# EAGLE board SimpleTimerPCB (EAGLE 6.5.0)

Size 50 x 30 mm. Coordinates in mm from the lower left corner, seen from the top.
Outline: 0,0 50,0 50,30 0,30 0,0
Copper layers (1*16): Top 0.035mm / dielectric 1.5mm / Bottom 0.035mm
Design rules "Elecrow_2-layer_eagle_rule": minimum track width 6mil, minimum drill 12mil, track to track 6mil, track to pad 6mil, pad to pad 6mil, via to via 6mil, smd to smd 0mil, copper to edge 10mil, drill to drill 10mil, minimum pad ring 10mil, minimum via ring 6mil, stop-mask expansion 2mil, vias tented up to drill 100mil, thermal gap 10mil
Net classes: 0 default: width 0.61 mm, clearance 0.508 mm; 1 Power: width 0.914 mm, clearance 0.508 mm
Holes 3.2 mm at 3,27 3,3 47,3 47,27

## Footprints (pad centres in the part's own frame; a part is rotated, then mirrored left to right if it is on the bottom)
C050-024X044 = drill 0.813 octagon: 1 -2.54,0; 2 2.54,0
DIL8 = drill 0.813 long: 1 -3.81,-3.81; 2 -1.27,-3.81; 3 1.27,-3.81; 4 3.81,-3.81; 5 3.81,3.81; 6 1.27,3.81; 7 -1.27,3.81; 8 -3.81,3.81
1X02 = drill 1.016 long: 1 -1.27,0; 2 1.27,0
1X06 = drill 1.016 long: 1 -6.35,0; 2 -3.81,0; 3 -1.27,0; 4 1.27,0; 5 3.81,0; 6 6.35,0
LED3MM = drill 0.813 octagon: A -1.27,0; K 1.27,0
1,6/0,9 = drill 0.914 pad 1.6 octagon: 1 0,0
0204/7 = drill 0.813 octagon: 1 -3.81,0; 2 3.81,0
TACTSW-25X20 = drill 1.016 long: 1 -2.54,2.54; 2 3.81,2.54; 3 -2.54,-2.54; 4 3.81,-2.54

## Placement (x,y rotation side)
C1  0.1u  [C050-024X044]  13.97,12.7 90 top
IC1  PIC12F683P  [DIL8]  21.59,12.7 0 top
JP1  [1X02]  8.89,12.7 90 top
JP2  [1X06]  15.24,24.13 0 top
JP3  [1X02]  26.67,24.13 0 top
LED1  [LED3MM]  20.32,3.81 0 top
PAD1  [1,6/0,9]  26.67,3.81 0 top
PAD2  [1,6/0,9]  41.91,16.51 0 top
PAD3  [1,6/0,9]  31.75,16.51 0 top
PAD4  [1,6/0,9]  31.75,3.81 0 top
PAD5  [1,6/0,9]  34.29,16.51 0 top
PAD6  [1,6/0,9]  36.83,16.51 0 top
PAD7  [1,6/0,9]  39.37,16.51 0 top
PAD8  [1,6/0,9]  34.29,3.81 0 top
PAD9  [1,6/0,9]  31.75,13.97 0 top
PAD10  [1,6/0,9]  34.29,13.97 0 top
PAD11  [1,6/0,9]  36.83,13.97 0 top
PAD12  [1,6/0,9]  39.37,13.97 0 top
PAD13  [1,6/0,9]  41.91,13.97 0 top
PAD14  [1,6/0,9]  36.83,3.81 0 top
PAD15  [1,6/0,9]  31.75,11.43 0 top
PAD16  [1,6/0,9]  34.29,11.43 0 top
PAD17  [1,6/0,9]  36.83,11.43 0 top
PAD18  [1,6/0,9]  39.37,11.43 0 top
PAD19  [1,6/0,9]  41.91,11.43 0 top
PAD20  [1,6/0,9]  39.37,3.81 0 top
PAD21  [1,6/0,9]  31.75,8.89 0 top
PAD22  [1,6/0,9]  34.29,8.89 0 top
PAD23  [1,6/0,9]  36.83,8.89 0 top
PAD24  [1,6/0,9]  39.37,8.89 0 top
PAD25  [1,6/0,9]  41.91,8.89 0 top
PAD26  [1,6/0,9]  41.91,3.81 0 top
PAD27  [1,6/0,9]  31.75,6.35 0 top
PAD28  [1,6/0,9]  34.29,6.35 0 top
PAD29  [1,6/0,9]  36.83,6.35 0 top
PAD30  [1,6/0,9]  39.37,6.35 0 top
PAD31  [1,6/0,9]  41.91,6.35 0 top
R1  330  [0204/7]  12.7,3.81 180 top
R2  10k  [0204/7]  12.7,20.32 0 top
SW1  [TACTSW-25X20]  36.83,22.86 0 top

## Library data of the parts
C1 R1 R2 = rcl
IC1 = MyParts; MF: MICROCHIP; MPN: PIC12F683-I/P; OC_FARNELL: 9759034; OC_NEWARK: 89H0442
JP1 JP3 = pinhead
JP2 PAD1-PAD31 = MyParts
LED1 = led
SW1 = MyParts; AKIZUKI-OC: P-03651

## Nets
GND [Power]: C1.2 IC1.8 JP1.2 JP2.3 JP3.2 LED1.K PAD2.1 SW1.3 SW1.4
N$1: LED1.A R1.1
N$2: IC1.4 JP2.1 R2.1 SW1.1 SW1.2
N$3: IC1.3 PAD1.1
N$4: IC1.2 R1.2
N$6: IC1.5 JP3.1
PIN4: IC1.7 JP2.4
PIN5: IC1.6 JP2.5
VDD [Power]: C1.1 IC1.1 JP1.1 JP2.2 PAD3.1 R2.2

## Tracks (layer width: path | path; a pad name or v marks a point on that pad's centre or on a via)
GND  (8 unrouted)
N$1  (1 unrouted)
N$2  (4 unrouted)
N$3  (1 unrouted)
N$4  (1 unrouted)
N$6  (1 unrouted)
PIN4  (1 unrouted)
PIN5  (1 unrouted)
VDD  (5 unrouted)